# Altium PCB boardV2.PcbDoc
Units mm, origin at the board's own origin, x right, y up, seen from the top; angles counter-clockwise.
Board outline 40 x 30 mm, 2 copper layers (Top Layer, Bottom Layer); 24 components, 17 nets, 145 pads, 16 vias.
Unrouted connection lines stored in the file: 30.
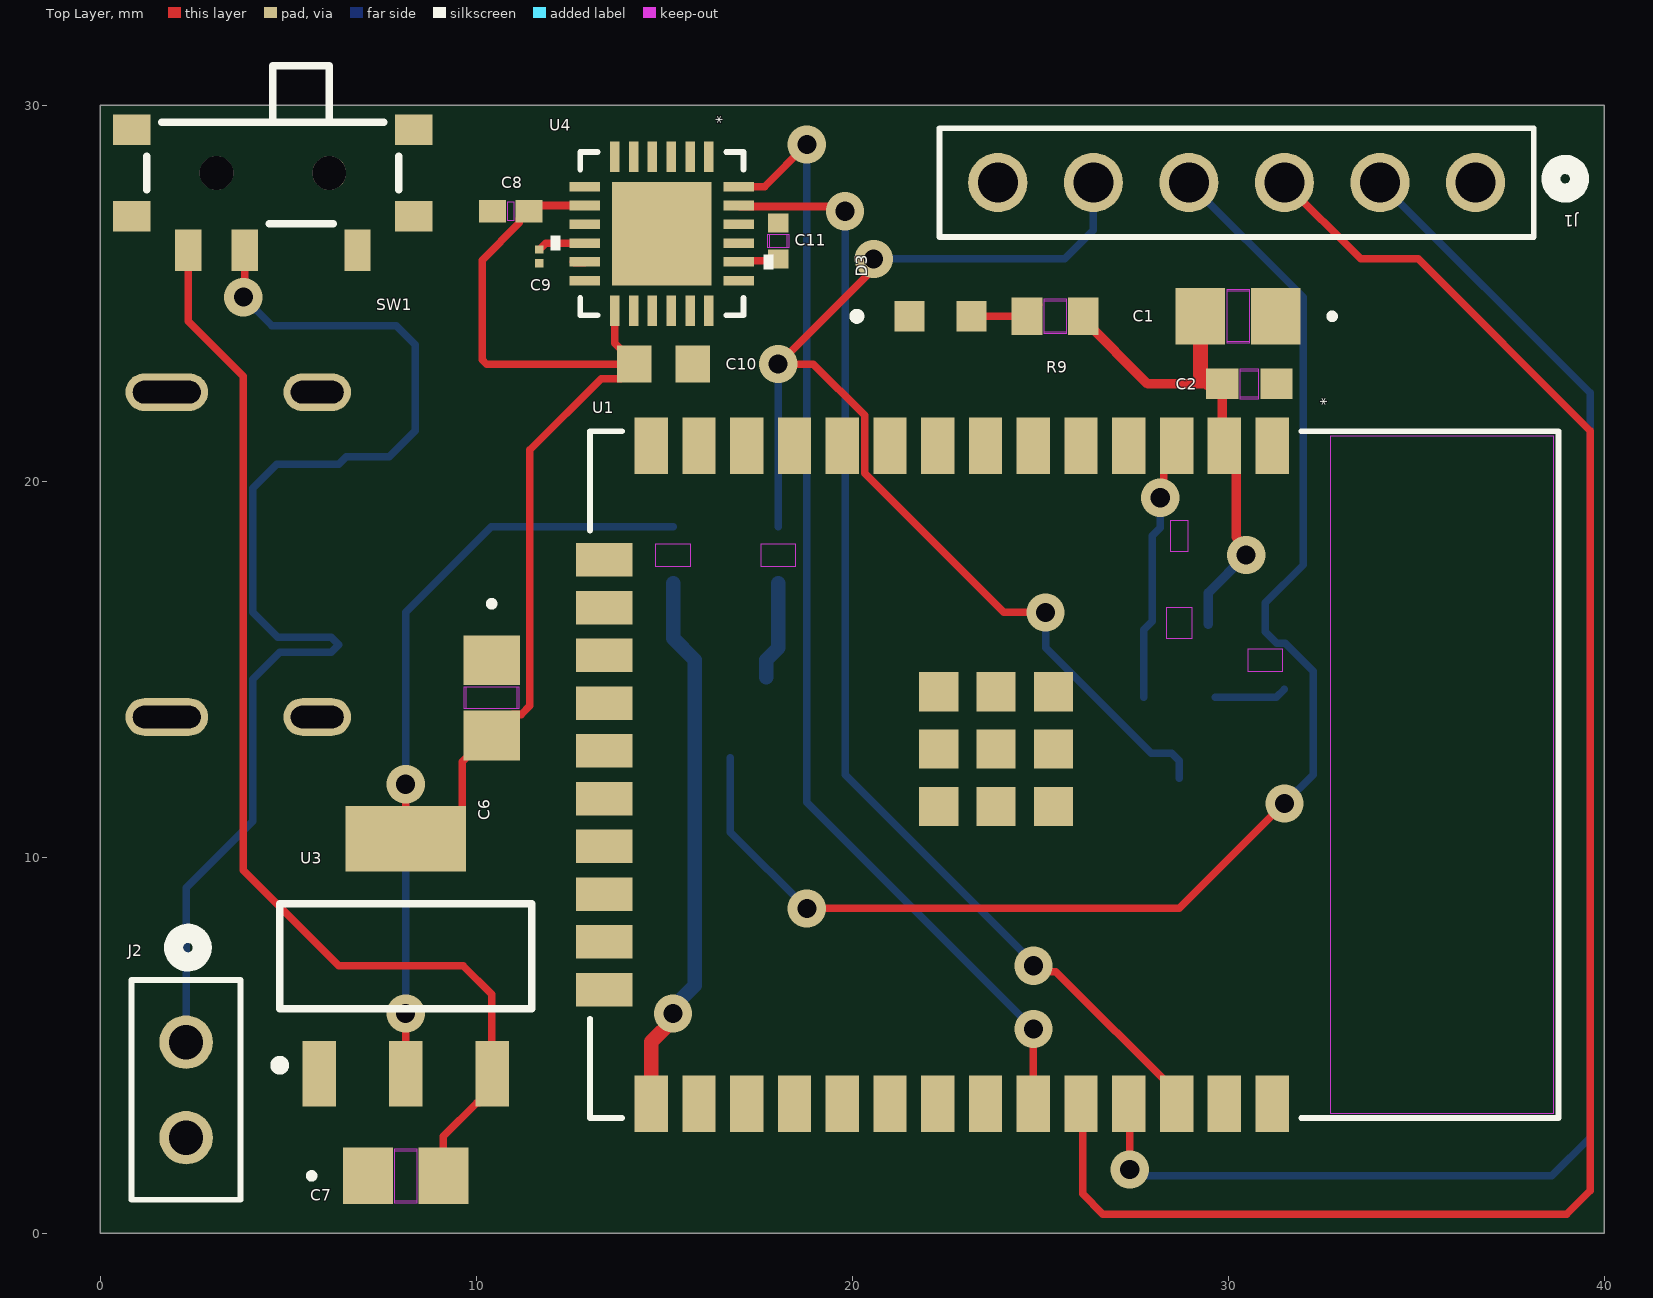
[diagram p0: Top Layer view]
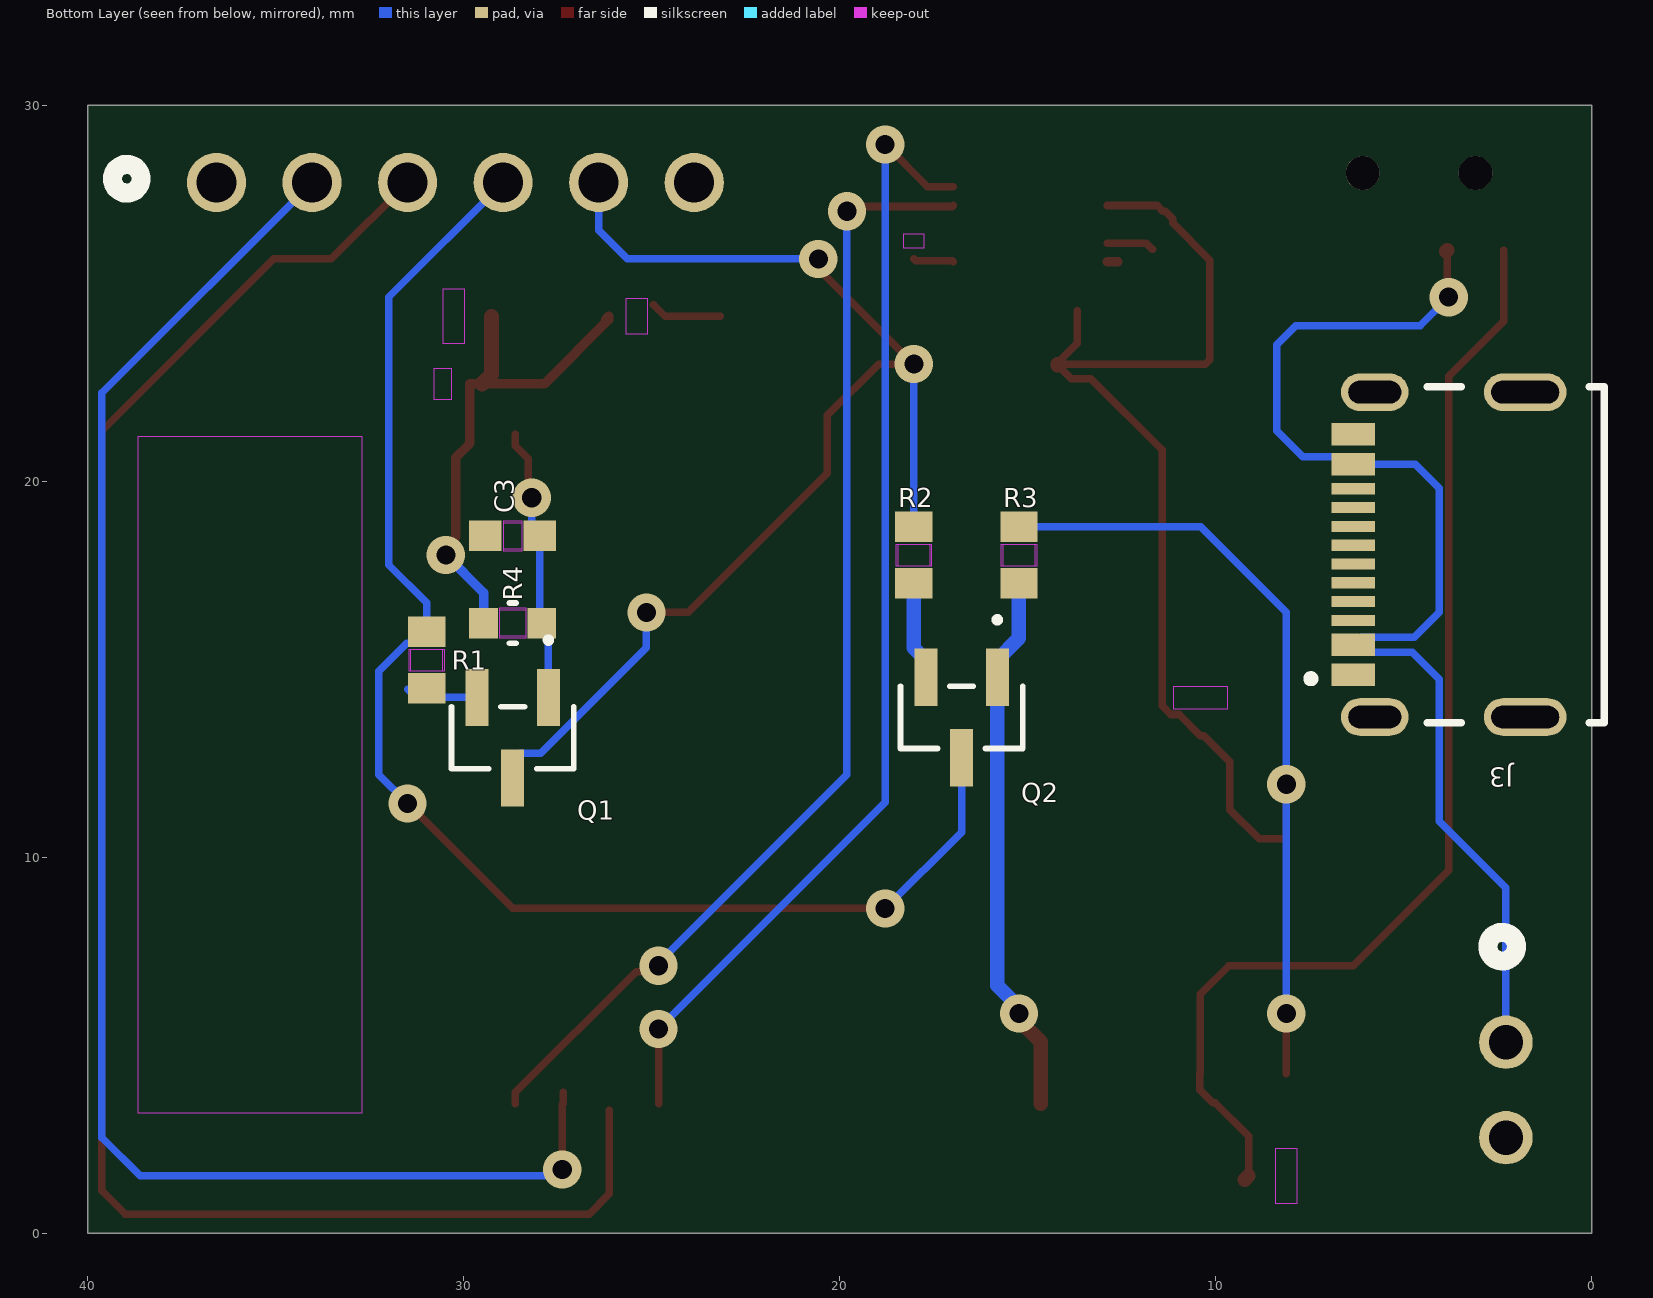
[diagram p1: Bottom Layer view, seen from below]
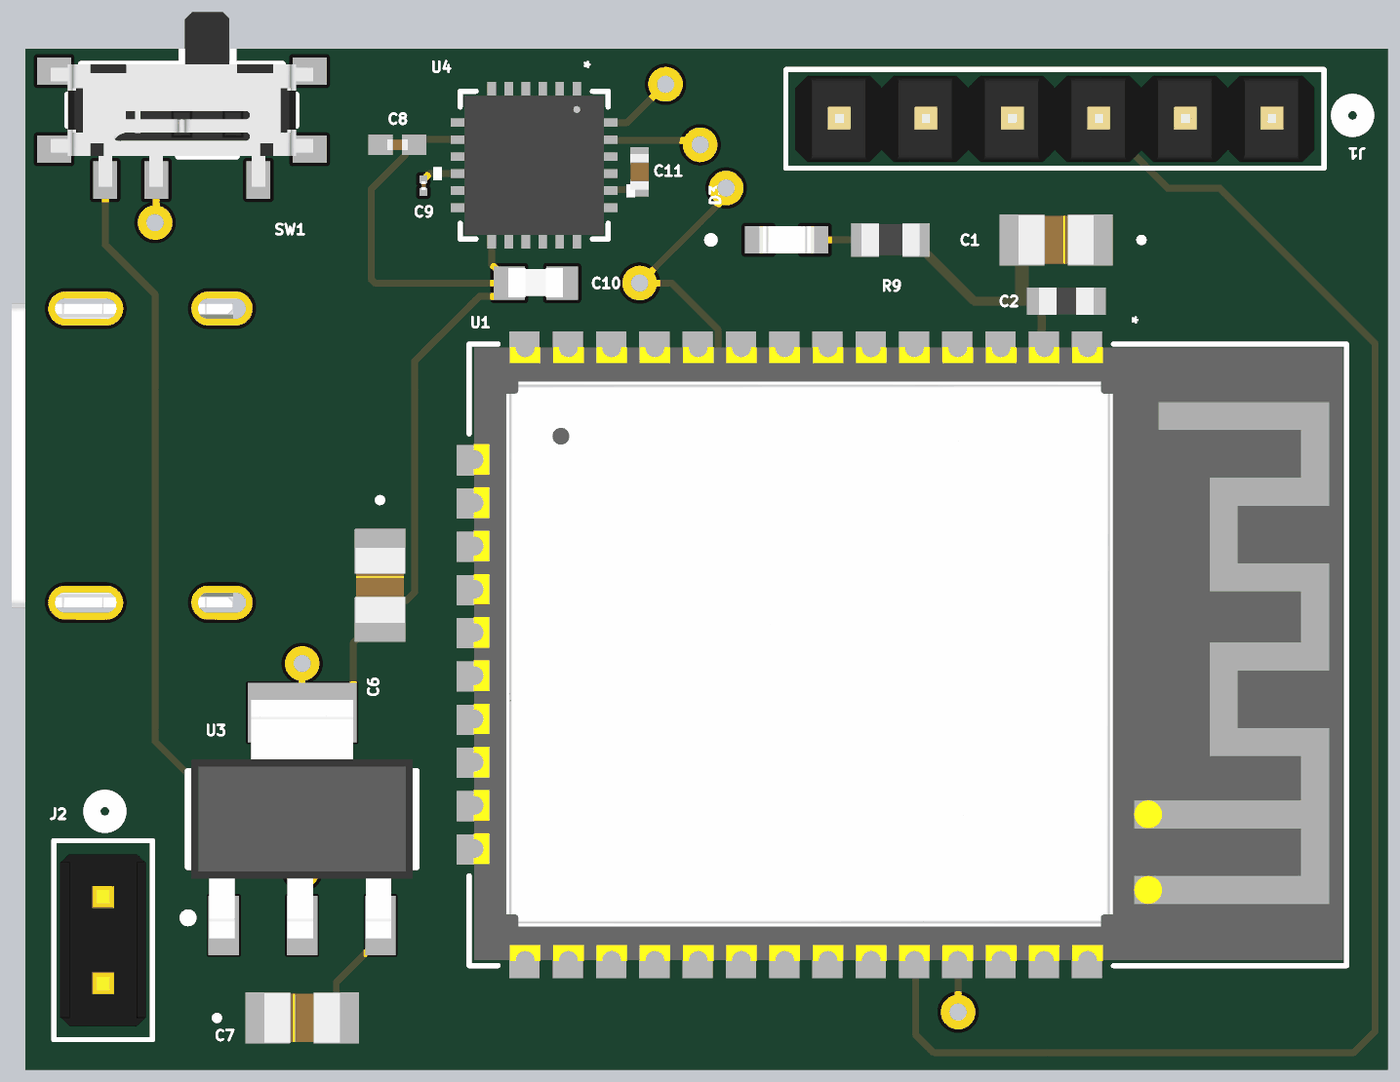
[diagram p2: 3D render of the assembled board from above, using the file's embedded part models]
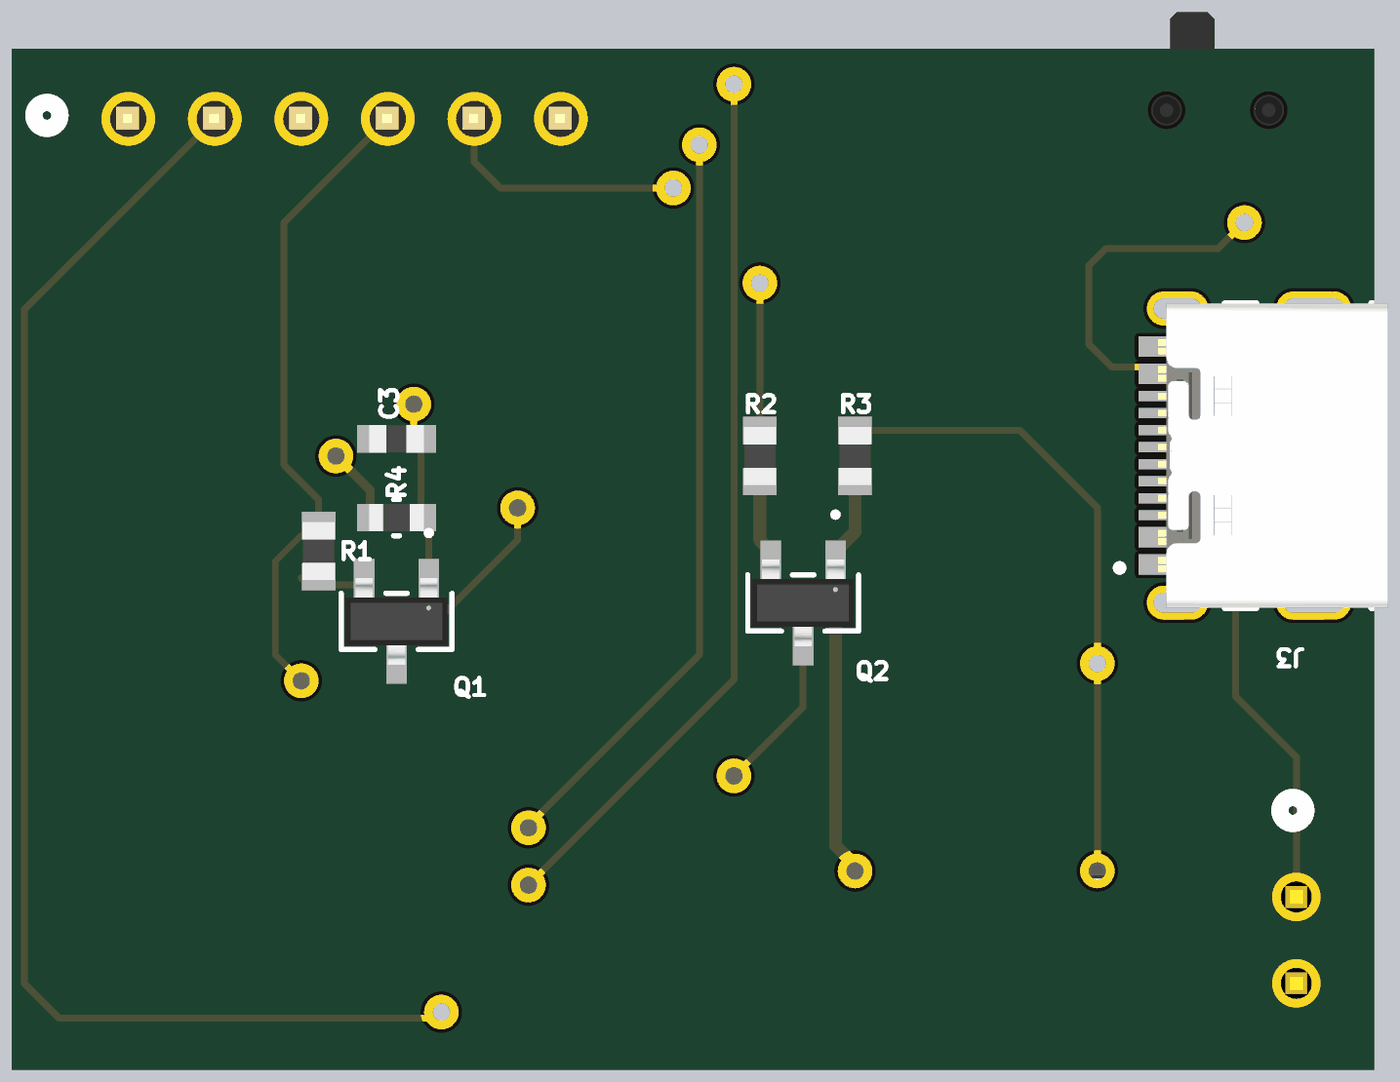
[diagram p3: 3D render of the assembled board from below, using the file's embedded part models]

## Layer stack, top to bottom
Top Solder: solder mask 0.0102, Solder Resist, Dk 3.5
Top Layer: signal copper 0.0356
Dielectric 1: dielectric 0.32, FR-4, Dk 4.8
Bottom Layer: signal copper 0.0356
Bottom Solder: solder mask 0.0102, Solder Resist, Dk 3.5

## Board outline
0,0 40,0 40,30 0,30

## Design rules (kind name [scope] priority, off if disabled: settings)
Clearance [All] p1: gap=0.05 ignorepadtopadclearanceinfootprint=FALSE
PolygonConnect [All] p1: connectstyle=Relief reliefconductorwidth=0.254 reliefentries=4 polygonreliefangle="90 Angle" airgapwidth=0.254
RoutingVias [All] p1: holewidth=0.305 width=0.61 viastyle="Through Hole" minholewidth=0.203 minwidth=0.406 maxholewidth=0.508 maxwidth=1.016
SolderMaskExpansion [All] p1: expansion=0.102 istentingtop=FALSE
Width Width_powerNets [InNetClass('PowerNets')] p1: maxlimit=1 minlimit=0.254 preferedwidth=0.4
Width [All] p2: maxlimit=0.5 minlimit=0.2 preferedwidth=0.254
30 further rules are at their usual default settings.

## Components (designator, comment, footprint, x,y, rotation, side; value= is the part's Value field where it differs from the comment)
C1 "22uF/10V(20%)" CAP_LMK212B_2X1P25_TAY-M 30.264,24.384 r180 top
C2 "0.1uF/50V(10%)" CC0603N_YAG 30.562,22.584 r180 top
C3 "0.1uF/50V(10%)" CC0603N_YAG 28.702,18.542 r180 bottom
C6 "22uF/10V(20%)" CAP_LMK212B_2X1P25_TAY-M 10.414,14.237 r270 top
C7 "22uF/10V(20%)" CAP_LMK212B_2X1P25_TAY-M 8.128,1.524 r0 top
C8 "10nF 4V" CAP_02013J0R1PBSTR500 10.922,27.178 r0 top
C9 "0.1UF 2.5V 0402" CAPC0201X13N 11.684,25.977 r90 top
C10 "0.1uF 4V" CAPC1608X90N 14.986,23.114 r180 top
C11 "2.2nF 50V 0402" CAPC10555_55N_KEM 18.034,26.385 r270 top
D3 "BLUE" LED_KP-1608SURCK 22.352,24.384 r0 top
J1 "G800W302018EU" CONN6x1_G800W302018EU_AMP 36.576,27.94 r180 top
J2 "M20-9990246" CONN2_M20-999_1x2_HRW 2.286,5.08 r90 top
J3 "USB4215-03-A_REVA" GCT_USB4215-03-A_REVA 1.775,18.046 r90 bottom
Q1 "(NPN)SS8050-G" (NPN)SS8050-G 28.702,13.176 r0 bottom
Q2 "(NPN)SS8050-G" (NPN)SS8050-G 16.764,13.716 r0 bottom
R1 "10K(5%)" STA_RMCF0603_STP-M 30.988,15.24 r270 bottom
R2 "10K(5%)" STA_RMCF0603_STP-M 18.034,18.034 r270 bottom
R3 "10K(5%)" STA_RMCF0603_STP-M 15.24,18.034 r90 bottom
R4 "22K" RC0603N_YAG 28.702,16.224 r180 bottom
R9 "1K" STA_RMCF0603_STP-M 25.4,24.384 r180 top
SW1 "Mini Slide Switch" 450404015514 4.596,28.194 r0 top
U1 "ESP32 WROOM" MOD_ESP32-WROOM-32_EXP 25.908,12.192 r270 top
U3 "AMS1117-3.3" AMS1117-3.3 8.128,7.366 r90 top
U4 "MPU-6050" QFN24_4X4X0P9-0P5_TDK-M 14.94,26.58 r270 top

## Footprints (in the part's own frame and the unit in brackets; to place one, negate y for a bottom-side part, rotate by r counter-clockwise, add the part's x,y. Pads: shape width x height; smd on the part's side, far side on the other; paste and mask are expansions set on the pad)
450404015514 [mm] "Right angle Slide Switch"
  rect 0.7x1.1 smd: COM(-0.75,-2.05) L1(2.25,-2.05) L2(-2.25,-2.05)
  round 0.9 hole 0.9 unplated: M1(-1.5,0) M2(1.5,0)
  rect 1x0.8 smd: M3(-3.75,1.15) M4(3.75,1.15) M5(-3.75,-1.15) M6(3.75,-1.15)
  silkscreen extent -3.35,-1.35 3.35,2.85, body extent -3.85,-2.25 3.85,2.88, height 1.4
(NPN)SS8050-G [mil]
  rect 24x60 smd paste+0 mask+0: 1(-37.4,-42.2) 2(37.4,-42.2) 3(0,42.2)
  silkscreen extent -64,-105 64,32, body extent -59,-50 59,50, height 41
AMS1117-3.3 [mm]
  rect 1.75x0.9 smd paste+0 mask+0.051: 1(-3.125,2.3) 2(-3.125,0) 3(-3.125,-2.3)
  rect 1.75x3.2 smd paste+0 mask+0.051: 4(3.125,0)
  silkscreen extent -3.02,-3.35 1.4,3.47, body extent -3.5,-3.25 3.5,3.25, height 1.68
CAP_02013J0R1PBSTR500 [mm]
  rect 0.72x0.6 smd paste+0 mask+0: 1(-0.49,0) 2(0.49,0)
  Top Layer keep-out region: -0.079,-0.249 -0.079,0.249 0.079,0.249 0.079,-0.249
  body extent -0.3,-0.16 0.3,0.16, height 0.28
CAP_LMK212B_2X1P25_TAY-M [mil]
  rect 52x59 smd paste+0 mask+0: 1(-39.5,0) 2(39.5,0)
  Top Layer keep-out region: -11.5,-26.5 -11.5,26.5 11.5,26.5 11.5,-26.5
  Keep-Out Layer region: -11.5,-28.5 -11.5,28.5 11.5,28.5 11.5,-28.5
  silkscreen extent -102,-3 -96,3, body extent -44,-29 44,29, height 57
CAPC0201X13N [mm]
  rect 0.22x0.23 smd: 1(-0.185,0) 2(0.185,0)
  body extent -0.13,-0.08 0.13,0.06, height 0.06
CAPC1608X90N [mm]
  rect 0.92x0.98 smd: 1(-0.775,0) 2(0.775,0)
  body extent -0.8,-0.45 0.8,0.41, height 0.86
CAPC10555_55N_KEM [mm]
  rect 0.503x0.55 smd paste+0 mask+0: 1(-0.477,0) 2(0.477,0)
  Top Layer keep-out region: -0.174,-0.224 -0.174,0.224 0.174,0.224 0.174,-0.224
  Keep-Out Layer region: -0.174,-0.275 -0.174,0.275 0.174,0.275 0.174,-0.275
  body extent -0.53,-0.28 0.53,0.28, height 0.55
CC0603N_YAG [mil]
  rect 34x32 smd paste+0 mask+0: 1(-28.5,0) 2(28.5,0)
  Top Layer keep-out region: -9.5,-14 -9.5,14 9.5,14 9.5,-14
  Keep-Out Layer region: -9.5,-16 -9.5,16 9.5,16 9.5,-16
  body extent -31,-16 31,16, height 28
CONN2_M20-999_1x2_HRW [mil]
  round 56 / inner round 60 / far side round 56 hole 36 paste-28 mask+0: 1(0,0) 2(-100,0)
  silkscreen extent -165,-57 114,57, body extent -150,-50 50,50, height 100
CONN6x1_G800W302018EU_AMP [mil]
  round 62 / inner round 60 / far side round 62 hole 42 paste-31 mask+0: 1(0,0) 2(100,0) 3(200,0) 4(300,0) 5(400,0) 6(500,0)
  silkscreen extent -109,-57 561,57, body extent -50,-50 550,50, height 362
GCT_USB4215-03-A_REVA [mm]
  rect 0.6x1.15 smd: A1_B12(-3.2,4.575) A4_B9(-2.4,4.575) B1_A12(3.2,4.575) B4_A9(2.4,4.575)
  rect 0.3x1.15 smd: A5(-1.25,4.575) A6(-0.25,4.575) A7(0.25,4.575) A8(1.25,4.575) B5(1.75,4.575) B6(0.75,4.575) B7(-0.75,4.575) B8(-1.75,4.575)
  oval 1x2.2 hole 0.6 slot 1.8 at 90 deg: SHIELD(-4.32,0) SHIELD(4.32,0)
  oval 1x1.8 hole 0.6 slot 1.4 at 90 deg: SHIELD(-4.32,4) SHIELD(4.32,4)
  silkscreen extent -4.47,-2.1 4.47,5.8, body extent -4.47,-2.18 4.47,4.57, height 3.28
LED_KP-1608SURCK [mm]
  rect 0.8x0.8 smd: 1(0.825,0) 2(-0.825,0)
  silkscreen extent -2.32,-0.1 -2.12,0.1, body extent -0.8,-0.4 0.8,0.4, height 1.1
MOD_ESP32-WROOM-32_EXP [mil]
  rect 59x35 smd paste+0 mask+0: 1(-344.49,207.09) 2(-344.49,157.09) 3(-344.49,107.09) 4(-344.49,57.09) 5(-344.49,7.09) 6(-344.49,-42.91) 7(-344.49,-92.91) 8(-344.49,-142.91) 9(-344.49,-192.91) 10(-344.49,-242.91) 11(-344.49,-292.91) 12(-344.49,-342.91) 13(-344.49,-392.91) 14(-344.49,-442.91) 25(344.49,-442.91) 26(344.49,-392.91) 27(344.49,-342.91) 28(344.49,-292.91) 29(344.49,-242.91) 30(344.49,-192.91) 31(344.49,-142.91) 32(344.49,-92.91) 33(344.49,-42.91) 34(344.49,7.09) 35(344.49,57.09) 36(344.49,107.09) 37(344.49,157.09) 38(344.49,207.09)
  rect 35x59 smd paste+0 mask+0: 15(-225,-492.13) 16(-175,-492.13) 17(-125,-492.13) 18(-75,-492.13) 19(-25,-492.13) 20(25,-492.13) 21(75,-492.13) 22(125,-492.13) 23(175,-492.13) 24(225,-492.13)
  rect 41x41 smd paste+0 mask+0: 39(-26.77,-81.89) 40(-86.81,-21.85) 41(-86.81,-81.89) 42(-86.81,-141.93) 43(-26.77,-141.93) 44(33.27,-141.93) 45(33.27,-81.89) 46(33.27,-21.85) 47(-26.77,-21.85)
  Keep-Out Layer region: 354.5,502 -354.5,502 -354.5,268 354.5,268
  silkscreen extent -360,-507 360,507, body extent -356,-502 354,503, height 124
QFN24_4X4X0P9-0P5_TDK-M [mil]
  rect 32x10 smd paste+0 mask+0: 1(-80.5,49.22) 2(-80.5,29.53) 3(-80.5,9.85) 4(-80.5,-9.85) 5(-80.5,-29.54) 6(-80.5,-49.23) 13(80.5,-49.23) 14(80.5,-29.54) 15(80.5,-9.85) 16(80.5,9.85) 17(80.5,29.53) 18(80.5,49.22)
  rect 10x32 smd paste+0 mask+0: 7(-49.22,-80.5) 8(-29.54,-80.5) 9(-9.85,-80.5) 10(9.85,-80.5) 11(29.54,-80.5) 12(49.22,-80.5) 19(49.22,80.5) 20(29.54,80.5) 21(9.85,80.5) 22(-9.85,80.5) 23(-29.54,80.5) 24(-49.22,80.5)
  rect 108x104 smd paste+0 mask+0: 25(0,0)
  silkscreen extent -86,-116 86,116, body extent -81,-81 81,81, height 37
RC0603N_YAG [mil]
  rect 30x32 smd paste+0 mask+0: 1(-30.5,0) 2(30.5,0)
  Top Layer keep-out region: -13.5,-14 -13.5,14 13.5,14 13.5,-14
  Keep-Out Layer region: -13.5,-16 -13.5,16 13.5,16 13.5,-16
  silkscreen extent -3,-21 3,21, body extent -31,-16 31,16, height 28
STA_RMCF0603_STP-M [mil]
  rect 32x39 smd paste+0 mask+0: 1(-29.5,0) 2(29.5,0)
  Top Layer keep-out region: -11.5,-16.5 -11.5,16.5 11.5,16.5 11.5,-16.5
  Keep-Out Layer region: -11.5,-18.5 -11.5,18.5 11.5,18.5 11.5,-18.5
  body extent -34,-19 34,19, height 22

## Part data
C1 C6 C7: library part LMK212BBJ226MG-T, "No Description Available", Mfr_Name="Taiyo Yuden", Supplier Part Number 1=587-5464-1-ND, Supplier 1=Digikey
C2 C3: library part CC0603KRX7R7BB104, "No Description Available", Mfr_Name=Yageo, Supplier Part Number 1=2938116, Supplier 1="Future Electronics"
C8: library part 02014D103KAT2A, "Ceramic, X7R, 10nF ±10%, 4V", Mfr_Name="KYOCERA AVX", Supplier Part Number 1=581-02014D103KAT2A, Supplier 1=Mouser
C9: library part GRM152D70E104KE19D, "CAP CER 0.1UF 2.5V X7T 0402", Package=None, Supplier Part Number 1=GRM152D70E104KE19D-ND, Availability=Unavailable, MP=GRM152D70E104KE19D, Price=None, Supplier 1=Digikey
C10: library part 06034C104KAT2A, "CAP CER 0.1UF 4V X7R 0603", Package=None, Supplier Part Number 1=478-06034C104KAT2ACT-ND, Availability=Unavailable, MP=06034C104KAT2A, Price=None, Supplier 1=Digikey
C11: library part C0402C222K5RECAUTO7411, "CAP CER 0402 2.2NF 50V X7R 10%", Mfr_Name=Kemet, Supplier Part Number 1=80-C0402C222K5REAULR, Supplier 1=Mouser
D3: library part 150060BS55040, "Single Color LEDs WL-SMCD SMD Mono SMD 0603 Blue 465nm", Package="0603 Kingbright", Check_prices=https://www.snapeda.com/parts/KP-1608SURCK/Kingbright/view-part/?ref=eda, MF=Kingbright, MP=KP-1608SURCK, SnapEDA_Link=https://www.snapeda.com/parts/KP-1608SURCK/Kingbright/view-part/?ref=snap
J1: "No Description Available", Mfr_Name="Amphenol ICC", RefDes=RefDes, Type="Headers, Male Pins"
J2: "header 2x1", Mfr_Name=Harwin, RefDes=RefDes, Type=Type
J3: "Type C USB 2.0 Connector", Package=None, Check_prices=https://www.snapeda.com/parts/USB4215-03-A/Global+Connector+Technology/view-part/?ref=eda, MF="Global Connector Technology", MP=USB4215-03-A, SnapEDA_Link=https://www.snapeda.com/parts/USB4215-03-A/Global+Connector+Technology/view-part/?ref=snap
Q1 Q2: "No Description Available", Mfr_Name=Comchip, RefDes=RefDes, Type=Type
R1 R2 R3: library part RMCF0603JT10K0, "No Description Available", Mfr_Name="Stackpole International", Supplier Part Number 1=RMCF0603JT10K0CT-ND, Supplier 1=Digikey
R4: library part RC0603FR-0722KL, "No Description Available", Mfr_Name=Yageo, Supplier Part Number 1=1933787, Supplier 1="Future Electronics"
R9: library part RK73H1JRTTD1001D, "RES 1K", Mfr_Name="Stackpole International", Supplier Part Number 1=660-RK73H1JRTTD1001D, Supplier 1=Mouser
SW1: library part 450404015514, "WS-SLSU Mini Slide Switch, Same Side Connection Side Push, SPDT, 5VDC, 300mA, 240g", Manufacturer="Wurth Elektronik", Operating Temperature Max=85°C, Operating Temperature Min=-40°C, Rated Current=300mA, Rated Voltage=5VDC, Supplier Part Number 1=732-13665-1-ND, Category="Slide Switches", Circuit=SPDT, ComponentLink1Description="Website Link", ComponentLink1URL=https://www.we-online.com/redexpert/article/450404015514?ad, ComponentLink2Description="Datasheet Link", ComponentLink2URL=https://www.we-online.com/redexpert/spec/450404015514?ad, Contact Material="Copper Alloy", Contact Plating=Silver, Height=1.1mm, Length=6.7mm, Manufacturer Part Number=450404015514, Match Code=WS-SLSU, Mount="Surface Mount", Operation Force=240g, Packaging="Tape and Reel", Supplier 1=Digikey, Terminal Material="Copper Alloy", Terminal Plating=Silver, Width=2.7mm
U1: Supplier Part Number 1=1904-ESP32-WROOM-32E(M113EH3200PH3Q0)TR-ND, Supplier 1=Digikey
U3: "No Description Available", Mfr_Name="Texas Instruments", Supplier Part Number 1=4518-AMS1117-3.3CT-ND, RefDes=RefDes, Supplier 1=Digikey, Type=TYPE
U4: "No Description Available", Mfr_Name=TDK, Supplier Part Number 1=37T8113, RefDes=RefDes, Supplier 1=Newark, Type="Motion Sensors"

## Via types
v1: diameter 1.016, hole 0.508, Top Layer to Bottom Layer, 16 vias

## Nets (pads, with @x,y where several pads share a name; then routed paths per layer and width w, separated by ;. In a path a pad name is that pad's centre, name@x,y a point inside that pad or via, vN(x,y) a via of type N, cw(c..) or ccw(c..) an arc to the next point about the centre after c; other vN are vias at no path point)
3V3: C1.2 C2.2 C6.2 C8.2 C10.2 R3.2 R4.1 R9.1 U1.2 U3.2 U3.4 U4.8 U4.13 | length 63.2
  Top Layer w0.2: U3.2 v1(8.128,5.842) ; v1(8.128,11.938) U3.4 8.853,10.491 9.628,11.266 9.628,12.536 10.325,13.233 C6.2 10.974,13.794 11.199,13.794 11.43,14.025 11.43,20.828 13.326,22.724 13.851,22.724 C10.2@14.211,23.084 ; U4.8 11.564,27.33 C8.2 11.352,27.178 11.152,26.978 11.152,26.867 10.16,25.875 10.16,23.231 10.277,23.114 C10.2 14.211,23.144 13.69,23.665 U4.13
  Top Layer w0.254: R9.1@26.225,24.308 R9.1 26.149,24.295 27.86,22.584 29.515,22.584 C2.2 29.838,21.002 U1.2 30.215,20.625 30.215,18.505 30.48,18.24 v1(30.48,18.034)
  Top Layer w0.381: C10.2@14.211,23.084 C10.2
  Top Layer w0.4: C1.2 29.261,22.838 C2.2@29.515,22.584
  Bottom Layer w0.2: v1(8.128,5.842) v1(8.128,11.938) 8.128,16.51 10.401,18.783 R3.2
  Bottom Layer w0.254: R4.1@29.477,16.199 R4.1 29.477,17.031 v1(30.48,18.034)
CPOUT: C11.2 U4.20 | length 1.1
  Top Layer w0.2: U4.20 17.012,25.857 17.983,25.857 C11.2
DTR: J1.4 Q2.3 R1.1 | length 37.9
  Top Layer w0.2: v1(18.796,8.636) 28.702,8.636 v1(31.496,11.43)
  Bottom Layer w0.2: Q2.3 16.764,10.668 v1(18.796,8.636) ; J1.4 32.004,24.892 32.004,17.78 30.988,16.764 R1.1 31.294,15.683 31.519,15.683 32.258,14.944 32.258,12.192 v1(31.496,11.43)
ESP_EN: C3.2 Q1.1 R4.2 U1.3 | length 7.4
  Top Layer w0.2: v1(28.194,19.558) 28.283,19.647 28.283,20.598 U1.3 U1.3@28.628,21.247
  Bottom Layer w0.2: Q1.1 27.752,16.049 R4.2 27.978,16.275 C3.2 28.194,18.758 v1(28.194,19.558)
ESP_IO0: Q2.1 R3.1 U1.25 | length 14.6
  Top Layer w0.381: U1.25 14.658,5.088 15.24,5.67 v1(15.24,5.842)
  Bottom Layer w0.381: v1(15.24,5.842) 15.24,6.014 15.814,6.588 Q2.1 15.814,15.245 15.24,15.819 R3.1
GND: C1.1 C2.1 C3.1 C6.1 C7.1 C8.1 C9.1 C10.1 C11.1 D3.2 J1.6 J2.2 J3.A1_B12 J3.B1_A12 U1.1 U1.15 U1.38 U1.39 U1.40 U1.41 U1.42 U1.43 U1.44 U1.45 U1.46 U1.47 U3.1 U4.1 U4.11 U4.18 | length 0.3
  Top Layer w0.254: U4.11@12.616,25.83 U4.11
NetC7_2: C7.2 SW1.L2 U3.3 | length 30.6
  Top Layer w0.2: SW1.L2 2.346,24.247 3.81,22.783 3.81,9.652 6.35,7.112 9.652,7.112 10.414,6.35 10.414,4.255 U3.3 10.428,3.816 10.078,3.466 10.024,3.466 9.131,2.573 C7.2
  Top Layer w0.381: C7.2 C7.2@9.231,1.424
NetD3_1: D3.1 R9.2 | length 1.9
  Top Layer w0.2: D3.1 R9.2 R9.2@24.957,24.69
NetQ1_2: Q1.2 R1.2 | length 1.9
  Bottom Layer w0.2: Q1.2 31.285,14.248 31.496,14.459
NetQ2_2: Q2.2 R2.2 | length 2.6
  Bottom Layer w0.381: Q2.2 17.714,15.245 18.034,15.565 R2.2
REGOUT: C9.2 U4.10 | length 1.3
  Top Layer w0.2: C9.2 11.689,26.162 11.857,26.33 U4.10
RTS: J1.5 Q1.3 R2.1 | length 32.6
  Top Layer w0.2: v1(20.574,25.908) 20.574,25.654 v1(18.034,23.114) 18.972,23.114 20.332,21.753 20.332,20.212 24.034,16.51 v1(25.146,16.51)
  Bottom Layer w0.2: R2.1 v1(18.034,23.114) ; v1(20.574,25.908) 25.654,25.908 26.416,26.67 J1.5 ; v1(25.146,16.51) 25.146,15.575 27.955,12.766 28.497,12.766 28.702,12.561 Q1.3
RX0: J1.3 U1.34 | length 47.3
  Top Layer w0.2: U1.34@26.135,3.271 26.135,1.043 26.67,0.508 38.999,0.508 39.624,1.133 39.624,21.336 35.052,25.908 33.528,25.908 J1.3
SCL: U1.36 U4.23 | length 30.5
  Top Layer w0.2: U4.23 17.012,27.303 19.687,27.303 v1(19.812,27.178) ; v1@24.892,7.112 25.048,6.956 25.419,6.956 28.628,3.747 U1.36
  Bottom Layer w0.2: v1(19.812,27.178) 19.812,12.192 v1@24.892,7.112
  other v1: 24.828,7.112
SDA: U1.33 U4.24 | length 30.3
  Top Layer w0.2: U4.24 17.67,27.83 v1(18.796,28.956) ; U1.33 24.818,5.418 v1(24.828,5.428)
  Bottom Layer w0.2: v1(18.796,28.956) 18.796,11.46 v1(24.828,5.428)
TX0: J1.2 U1.35 | length 42.4
  Top Layer w0.2: U1.35@27.358,3.747 U1.35 27.384,3.416 v1(27.384,1.695)
  Bottom Layer w0.2: v1@27.431,1.524 38.608,1.524 39.624,2.54 39.624,22.352 J1.2
VCC: J2.1 J3.A4_B9 J3.B4_A9 SW1.COM | length 32.6
  Top Layer w0.2: v1(3.81,24.892) 3.846,24.928 SW1.COM
  Top Layer w0.381: SW1.COM SW1.COM@3.88,26.11
  Bottom Layer w0.2: J2.1 2.286,9.182 4.064,10.96 4.064,14.732 4.778,15.446 6.15,15.446 J3.A4_B9 6.15,15.846 4.728,15.846 4.064,16.51 4.064,19.812 4.698,20.446 J3.B4_A9 6.55,20.646 7.692,20.646 8.382,21.336 8.382,23.622 7.874,24.13 4.572,24.13 v1(3.81,24.892)
pads on no net: J1.1 J3.A5 J3.A6 J3.A7 J3.A8 J3.B5 J3.B6 J3.B7 J3.B8 J3.SHIELD SW1.L1 SW1.M1 SW1.M2 SW1.M3 SW1.M4 SW1.M5 SW1.M6 U1.4 U1.5 U1.6 U1.7 U1.8 U1.9 U1.10 U1.11 U1.12 U1.13 U1.14 U1.16 U1.17 U1.18 U1.19 U1.20 U1.21 U1.22 U1.23 U1.24 U1.26 U1.27 U1.28 U1.29 U1.30 U1.31 U1.32 U1.37 U4.2 U4.3 U4.4 U4.5 U4.6 U4.7 U4.9 U4.12 U4.14 U4.15 U4.16 U4.17 U4.19 U4.21 U4.22 U4.25
copper on no net: | length 0.2
  Top Layer w0.2: 36.576,27.94 36.788,27.94

## Text inside footprints (layer, text, board x,y; h text height)
U1: Top Overlay "*" at 32.336,22.214 h0.3 r270; Mechanical 13 "*" at 30.533,19.875 h1.27 r270
U4: Top Overlay "*" at 16.256,29.718 h0.3 r270; Mechanical 13 "*" at 15.555,27.748 h1.27 r270